# Altium PCB Motor_Driver_Model_D203.PcbDoc (part 4 of 4)
Units mm, origin at the board's own origin, x right, y up, seen from the top; angles counter-clockwise.
Board outline 50 x 35 mm, 4 copper layers (1-SIG-TOP, 2-SIG-GND, 3-SIG-PWR, 4-SIG-BOT), stack 0.96 mm thick; 141 components, 74 nets, 356 pads, 1049 vias.
Unrouted connection lines stored in the file: 1.
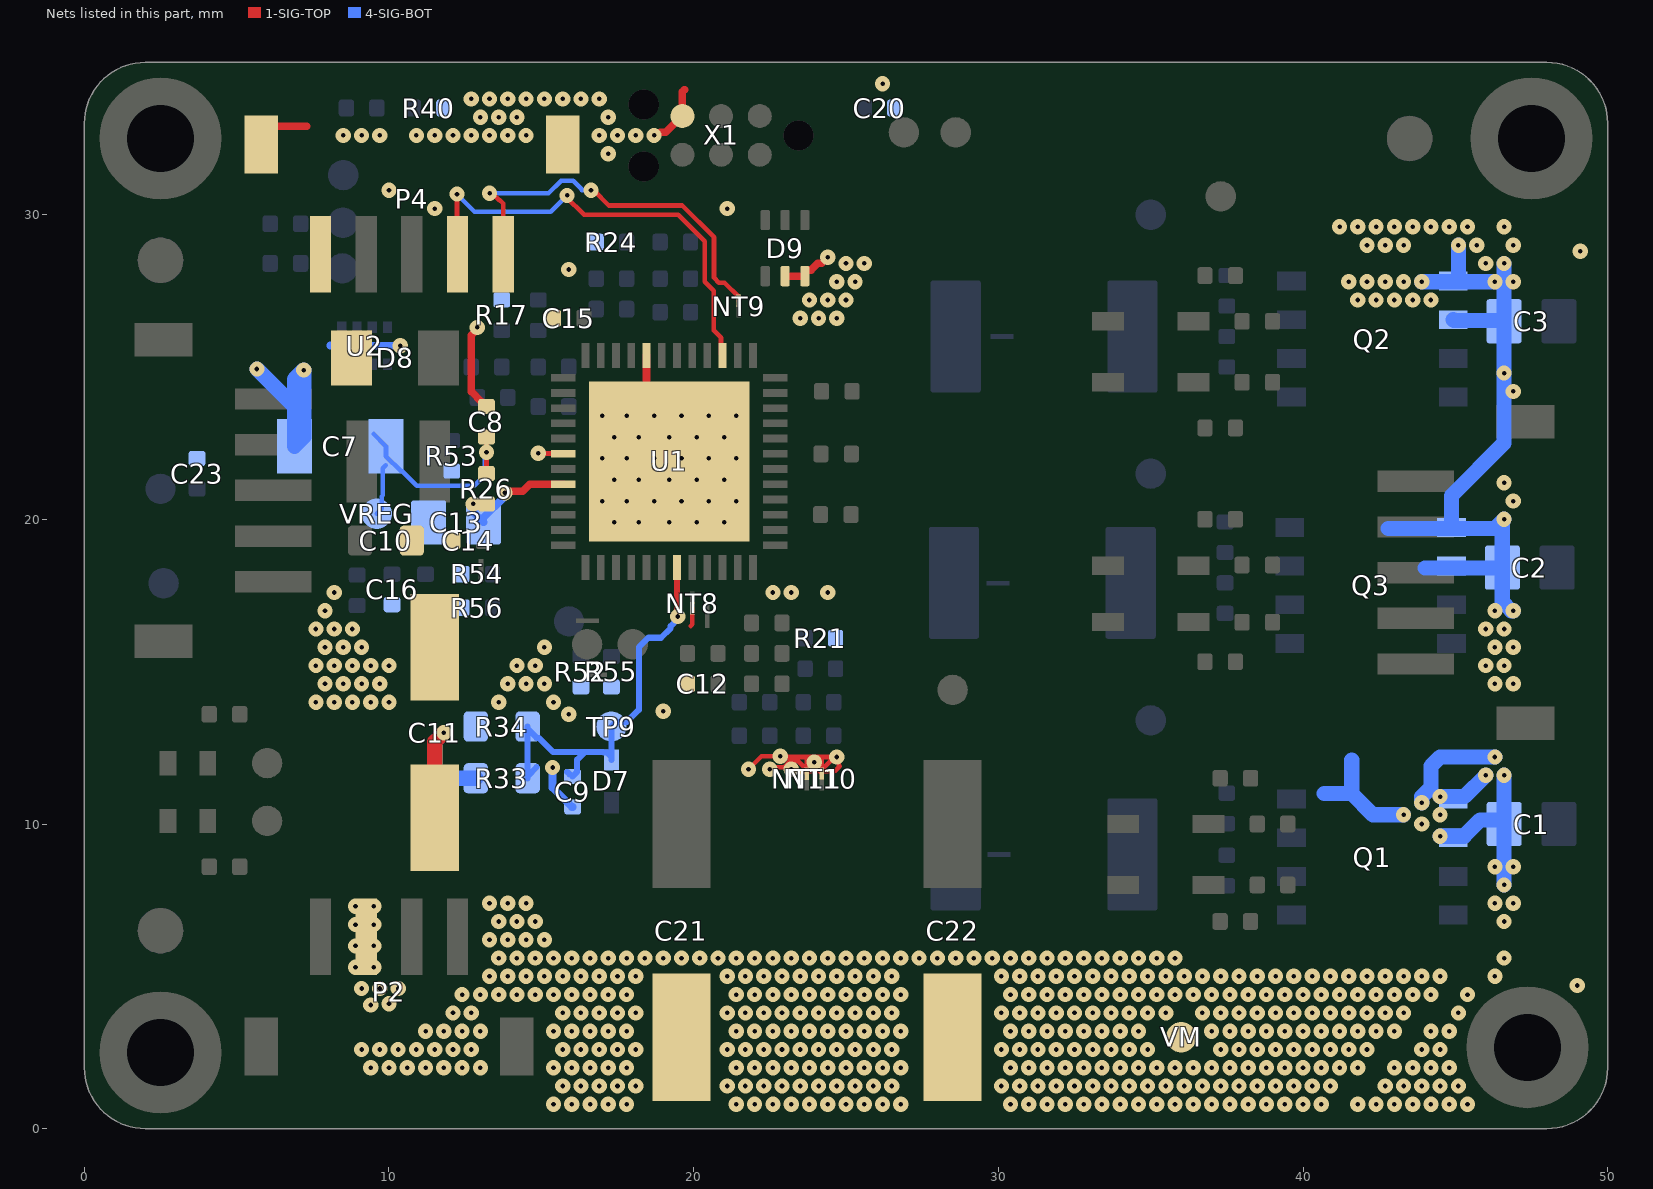
[diagram p5: the nets of this part, all layers, seen from the top]

## Via types
v1: diameter 0.5, hole 0.15, 1-SIG-TOP to 4-SIG-BOT, tented both sides, 1016 vias
v2: diameter 0.605, hole 0.3, 1-SIG-TOP to 4-SIG-BOT, tented both sides, 32 vias
v3: diameter 0.5, hole 0.15, 1-SIG-TOP to 4-SIG-BOT, 1 vias

## Nets (pads, with @x,y where several pads share a name; then routed paths per layer and width w, separated by ;. In a path a pad name is that pad's centre, name@x,y a point inside that pad or via, vN(x,y) a via of type N, cw(c..) or ccw(c..) an arc to the next point about the centre after c; other vN are vias at no path point) (continued)
SIG-GND: C7.1 C8.1 C9.1 C10.1 C11.2 C12.1 C13.1 C14.1 C15.1 C16.1 C20.1 C23.1 D8.2 D9.2 D9.3 NT8.1 NT10.1 NT11.1 P4.5 P4.S1 P4.S2 R17.1 R21.1 R24.1 R34.1 R40.2 R52.2 R53.2 R54.2 R55.2 R56.2 U1.44 U1.49 U2.9 X1.5 | length 32.5
  1-SIG-TOP w0.152: 19.9,16.5 19.958,16.558 NT8.1@19.958,17.076 ; v1(21.8,11.8) 22.226,12.226 v1(22.843,12.226) 22.869,12.2 23.7,12.2 ; v1(22.5,11.8) 22.567,11.867 22.965,11.867 23.158,12.059 23.432,12.059 NT11.1@23.711,11.78 ; v1(23.2,11.8) 23.267,11.733 NT11.1@23.711,11.733 ; NT11.1@23.711,11.653 NT11.1@23.711,11.732 ; NT10.1@24.2,11.656 NT10.1@24.2,11.731 ; 24.479,12.062 NT10.1@24.2,11.783 ; v1(24.7,12.2) 24.766,12.133 24.766,11.934 24.8,11.9 24.631,11.731 NT10.1@24.2,11.731 ; v1(24.7,12.2) 24.2,12.2 ; 23.7,12.2 23.957,12.2 v1@24.131,12.2 ; 23.7,12.2 23.711,12.189 NT11.1@23.711,11.78 ; NT11.1@23.711,11.732 NT10.1@24.2,11.732 ; NT11.1@23.711,11.732 NT11.1@23.711,11.733 ; NT11.1@23.711,11.733 NT11.1@23.711,11.78 ; NT11.1@23.711,11.78 23.921,11.989 v1(23.957,12.026) ; v1(23.957,12.026) v1@24.131,12.2 ; v1(23.957,12.026) NT10.1@24.2,11.783 ; v1@24.131,12.2 24.2,12.2 ; NT10.1@24.2,11.731 NT10.1@24.2,11.732 ; NT10.1@24.2,11.732 NT10.1@24.2,11.783 ; NT10.1@24.2,11.783 24.2,12.2
  1-SIG-TOP w0.25: P4.S2@5.8,32.3 5.8,32.475 6.225,32.9 7.3,32.9 ; D8.2@8.67,25.2 D8.2@8.77,25.3 ; v1(12.9,26.3) 12.9,26.232 12.704,26.036 12.704,24.196 13.05,23.85 13.05,23.825 13.175,23.7 C8.1@13.2,23.7 ; U1.44@18.45,25.38 18.45,22.65 U1.49@19.2,21.9 ; v1@18.9,32.7 19.078,32.7 19.613,33.235 X1.5@19.63,33.235 19.63,34.03 19.7,34.1 ; D9.2@23,27.98 D9.3@23.65,27.98 23.65,28.16 23.675,28.185 23.855,28.185 24.07,28.4 24.2,28.4
  4-SIG-BOT w0.25: 8.076,25.706 9.194,25.706 U2.9@9.2,25.7 v1(10.37,25.7) v1@10.372,25.703 ; v1(15.368,11.856) 15.368,11.193 16.002,10.559 C9.1@16.027,10.559
  4-SIG-BOT w0.5: v3(5.665,24.934) 6.9,23.699 ; 6.9,23.699 6.9,24.6 v1(7.2,24.9) 7.2,22.7 C7.1@6.9,22.4 6.9,23.699
  other v1: 15.9,13.6 19,13.7 7.6,14 8.2,14 8.8,14 9.4,14 10,14 13.6,14 15.4,14 7.9,14.6 8.5,14.6 9.1,14.6 9.7,14.6 13.9,14.6 14.5,14.6 15.1,14.6 7.6,15.2 8.2,15.2 8.8,15.2 9.4,15.2 10,15.2 14.2,15.2 14.8,15.2 7.9,15.8 8.5,15.8 9.1,15.8 15.1,15.8 7.6,16.4 8.2,16.4 8.8,16.4 7.9,17 8.2,17.6 22.6,17.6 23.2,17.6 24.4,17.6 17.4,19.9 18.2,19.9 19.2,19.9 20.1,19.9 21,19.9 17,20.6 17.8,20.6 18.7,20.6 19.6,20.6 20.5,20.6 21.4,20.6 17.4,21.3 18.2,21.3 19.2,21.3 20.1,21.3 21,21.3 17,22 17.8,22 18.7,22 19.6,22 20.5,22 21.4,22 17.4,22.7 18.2,22.7 19.2,22.7 20.1,22.7 21,22.7 17,23.4 17.8,23.4 18.7,23.4 19.6,23.4 20.5,23.4 21.4,23.4 23.5,26.6 24.1,26.6 24.7,26.6 23.8,27.2 24.4,27.2 25,27.2 24.7,27.8 25.3,27.8 15.9,28.2 25,28.4 25.6,28.4 24.4,28.6 11.5,30.2 21.1,30.2 10,30.799 17.2,31.999 8.5,32.599 9.1,32.599 9.7,32.599 10.9,32.599 11.5,32.599 12.1,32.599 12.7,32.599 13.3,32.599 13.9,32.599 14.5,32.599 16.9,32.599 17.5,32.599 18.1,32.599 18.7,32.599 13,33.199 13.6,33.199 14.2,33.199 17.2,33.199 12.7,33.799 13.3,33.799 13.9,33.799 14.5,33.799 15.1,33.799 15.7,33.799 16.3,33.799 16.9,33.799 26.2,34.3
TP.VFB: C9.2 D7.2 R33.1 R34.2 TP9.1 U1.19 | length 14.2
  1-SIG-TOP w0.2: U1.19@19.45,18.42 19.45,16.836 v1(19.475,16.811)
  4-SIG-BOT w0.2: R34.2@14.55,13.2 R34.2@14.55,13.126 ; R33.1@14.847,11.871 14.55,11.574 R33.1@14.55,11.5 R34.2@14.55,13.126 ; C9.2@15.852,11.709 15.93,11.63 15.955,11.63 C9.2@16.027,11.559 16.177,11.708 16.177,12.109 16.425,12.357 ; D7.2@17.3,12.1 D7.2@17.3,12.2 ; v1(19.475,16.811) 19.475,16.73 19.241,16.495 19.241,16.425 18.928,16.112 18.512,16.112 18.2,15.8 18.2,13.744 17.809,13.353 17.453,13.353 TP9.1@17.3,13.2 D7.2@17.3,12.2 ; R34.2@14.55,13.126 14.847,12.829 14.921,12.829 15.393,12.357 16.425,12.357 ; 16.425,12.357 17.043,12.357 17.05,12.35 17.15,12.35 D7.2@17.3,12.2
TP.VREG: C7.2 C8.2 R26.2 U1.6 VREG.1 | length 9.2
  1-SIG-TOP w0.152: R26.2@13.2,21.5 C8.2@13.2,22.7 ; v1(14.9,22.171) 14.911,22.161 15.709,22.161 U1.6@15.72,22.15
  4-SIG-BOT w0.152: C7.2@9.5,22.8 C7.2@9.9,22.4 9.9,22.075 10.399,21.576 10.439,21.576 10.915,21.1 12.8,21.1 13.151,21.451 13.151,22.151 v1(13.2,22.2) ; VREG.1@9.598,20.183 9.76,20.345 9.76,20.75 9.8,20.79 9.8,21.68 C7.2@9.899,21.779
USART1_RX: P4.2 U1.39 | length 15.3
  1-SIG-TOP w0.152: v1(12.233,30.675) 12.233,28.717 P4.2@12.25,28.7 ; v1(15.845,30.632) 15.805,30.592 16.402,29.995 19.498,29.995 20.364,29.129 20.364,27.798 20.657,27.505 20.657,26.2 20.899,25.958 20.899,25.431 U1.39@20.95,25.38
  4-SIG-BOT w0.152: v1(12.233,30.675) 12.807,30.1 15.313,30.1 v1(15.845,30.632)
USART1_TX: NT9.2 P4.1 | length 13.1
  1-SIG-TOP w0.152: v1(13.3,30.7) 13.394,30.7 13.621,30.473 13.642,30.473 13.75,30.365 P4.1@13.75,28.7 ; v1(16.631,30.802) 16.717,30.802 17.219,30.3 19.624,30.3 20.669,29.255 20.669,27.924 20.829,27.764 21.013,27.764 21.474,27.303 NT9.2@21.474,27.176
  4-SIG-BOT w0.152: v1(13.3,30.7) 15.236,30.7 15.647,31.11 16.043,31.11 16.324,30.83 16.324,30.802 v1(16.631,30.802)
VM: C1.2 C2.2 C3.2 C11.1 C13.2 C21.1 C22.1 P2.2 Q1.1D-A Q1.1D-B Q2.1D-A Q2.1D-B Q3.1D-A Q3.1D-B R26.1 R33.2 U1.8 VM.1 | length 49.7
  1-SIG-TOP w0.25: v1(12.768,20.507) 12.771,20.504 13.196,20.504 R26.1@13.2,20.5 ; v1(13.806,20.872) 13.854,20.92 14.387,20.92 14.618,21.15 U1.8@15.72,21.15
  1-SIG-TOP w0.5: C11.1@11.5,10.2 11.504,10.204 11.504,12.7 11.8,12.996 v1(11.804,12.996)
  4-SIG-BOT w0.25: v1(12.768,20.507) 12.768,20.232 C13.2@13.1,19.9 ; C13.2@13.1,20.05 13.758,20.708 13.758,20.824 v1(13.806,20.872)
  4-SIG-BOT w0.5: v1(11.804,12.996) 11.507,12.699 11.507,11.793 11.8,11.5 R33.2@12.85,11.5 ; 40.7,11 41.6,11 ; 41.6,12.1 41.6,11 ; 42.8,19.7 46.3,19.7 v1@46.543,19.942 ; v1(43.3,10.3) 42.3,10.3 41.6,11 ; v1(43.9,27.8) v1(46.3,27.8) ; v1(43.9,10.7) 43.9,10.9 44.2,11.2 44.2,11.9 44.5,12.2 v1@46.299,12.2 ; 44,18.4 46.527,18.4 C2.2@46.543,18.415 ; v1(44.5,9.6) 45.289,9.6 45.816,10.127 46.473,10.127 C1.2@46.6,10 ; v1(44.5,10.9) 45.3,10.9 v1(46,11.6) ; Q3.1D-A@44.873,19.735 44.873,20.773 46.6,22.5 v1(46.6,24.8) ; Q2.1D-B@44.93,26.55 44.955,26.525 46.575,26.525 C3.2@46.6,26.5 ; Q2.1D-A@44.93,27.82 45.04,27.82 45.1,27.88 v1(45.1,29) ; v1(46.6,20) v1@46.543,19.942 ; v1(46.6,8) C1.2@46.6,10 ; v1(46.6,11.6) C1.2@46.6,10 ; v1(46.6,24.8) C3.2@46.6,26.5 ; v1(46.6,28.4) C3.2@46.6,26.5 ; v1(46.9,17) 46.836,17 46.543,17.292 C2.2@46.543,18.415 ; C2.2@46.543,18.415 v1@46.543,19.942
  other v1: 15.4,0.8 16,0.8 16.6,0.8 17.2,0.8 17.8,0.8 21.4,0.8 22,0.8 22.6,0.8 23.2,0.8 23.8,0.8 24.4,0.8 25,0.8 25.6,0.8 26.2,0.8 26.8,0.8 30.4,0.8 31,0.8 31.6,0.8 32.2,0.8 32.8,0.8 33.4,0.8 34,0.8 34.6,0.8 35.2,0.8 35.8,0.8 36.4,0.8 37,0.8 37.6,0.8 38.2,0.8 38.8,0.8 39.4,0.8 40,0.8 40.6,0.8 41.8,0.8 42.4,0.8 43,0.8 43.6,0.8 44.2,0.8 44.8,0.8 45.4,0.8 15.7,1.4 16.3,1.4 16.9,1.4 17.5,1.4 18.1,1.4 21.1,1.4 21.7,1.4 22.3,1.4 22.9,1.4 23.5,1.4 24.1,1.4 24.7,1.4 25.3,1.4 25.9,1.4 26.5,1.4 30.1,1.4 30.7,1.4 31.3,1.4 31.9,1.4 32.5,1.4 33.1,1.4 33.7,1.4 34.3,1.4 34.9,1.4 35.5,1.4 36.1,1.4 36.7,1.4 37.3,1.4 37.9,1.4 38.5,1.4 39.1,1.4 39.7,1.4 40.3,1.4 40.9,1.4 42.7,1.4 43.3,1.4 43.9,1.4 44.5,1.4 45.1,1.4 9.4,2 10,2 10.6,2 11.2,2 11.8,2 12.4,2 13,2 15.4,2 16,2 16.6,2 17.2,2 17.8,2 21.4,2 22,2 22.6,2 23.2,2 23.8,2 24.4,2 25,2 25.6,2 26.2,2 26.8,2 30.4,2 31,2 31.6,2 32.2,2 32.8,2 33.4,2 34,2 34.6,2 35.2,2 35.8,2 36.4,2 37,2 37.6,2 38.2,2 38.8,2 39.4,2 40,2 40.6,2 41.2,2 41.8,2 43,2 43.6,2 44.2,2 44.8,2 9.1,2.6 9.7,2.6 10.3,2.6 10.9,2.6 11.5,2.6 12.1,2.6 12.7,2.6 15.7,2.6 16.3,2.6 16.9,2.6 17.5,2.6 18.1,2.6 21.1,2.6 21.7,2.6 22.3,2.6 22.9,2.6 23.5,2.6 24.1,2.6 24.7,2.6 25.3,2.6 25.9,2.6 26.5,2.6 30.1,2.6 30.7,2.6 31.3,2.6 31.9,2.6 32.5,2.6 33.1,2.6 33.7,2.6 34.3,2.6 34.9,2.6 37.3,2.6 37.9,2.6 38.5,2.6 39.1,2.6 39.7,2.6 40.3,2.6 40.9,2.6 41.5,2.6 42.1,2.6 43.9,2.6 44.5,2.6 11.2,3.2 11.8,3.2 12.4,3.2 13,3.2 15.4,3.2 16,3.2 16.6,3.2 17.2,3.2 17.8,3.2 21.4,3.2 22,3.2 22.6,3.2 23.2,3.2 23.8,3.2 24.4,3.2 25,3.2 25.6,3.2 26.2,3.2 26.8,3.2 30.4,3.2 31,3.2 31.6,3.2 32.2,3.2 32.8,3.2 33.4,3.2 34,3.2 34.6,3.2 37,3.2 37.6,3.2 38.2,3.2 38.8,3.2 39.4,3.2 40,3.2 40.6,3.2 41.2,3.2 41.8,3.2 42.4,3.2 43,3.2 44.2,3.2 44.8,3.2 12.1,3.8 12.7,3.8 15.7,3.8 16.3,3.8 16.9,3.8 17.5,3.8 18.1,3.8 21.1,3.8 21.7,3.8 22.3,3.8 22.9,3.8 23.5,3.8 24.1,3.8 24.7,3.8 25.3,3.8 25.9,3.8 26.5,3.8 30.1,3.8 30.7,3.8 31.3,3.8 31.9,3.8 32.5,3.8 33.1,3.8 33.7,3.8 34.3,3.8 34.9,3.8 35.5,3.8 36.7,3.8 37.3,3.8 37.9,3.8 38.5,3.8 39.1,3.8 39.7,3.8 40.3,3.8 40.9,3.8 41.5,3.8 42.1,3.8 42.7,3.8 43.3,3.8 45.1,3.8 9.401,4.058 10,4.1 12.4,4.4 13,4.4 13.6,4.4 14.2,4.4 14.8,4.4 15.4,4.4 16,4.4 16.6,4.4 17.2,4.4 17.8,4.4 21.4,4.4 22,4.4 22.6,4.4 23.2,4.4 23.8,4.4 24.4,4.4 25,4.4 25.6,4.4 26.2,4.4 26.8,4.4 30.4,4.4 31,4.4 31.6,4.4 32.2,4.4 32.8,4.4 33.4,4.4 34,4.4 34.6,4.4 35.2,4.4 35.8,4.4 36.4,4.4 37,4.4 37.6,4.4 38.2,4.4 38.8,4.4 39.4,4.4 40,4.4 40.6,4.4 41.2,4.4 41.8,4.4 42.4,4.4 43,4.4 43.6,4.4 44.2,4.4 45.4,4.4 9.1,4.6 9.7,4.6 10.3,4.6 49,4.7 13.3,5 13.9,5 14.5,5 15.1,5 15.7,5 16.3,5 16.9,5 17.5,5 18.1,5 21.1,5 21.7,5 22.3,5 22.9,5 23.5,5 24.1,5 24.7,5 25.3,5 25.9,5 26.5,5 30.1,5 30.7,5 31.3,5 31.9,5 32.5,5 33.1,5 33.7,5 34.3,5 34.9,5 35.5,5 36.1,5 36.7,5 37.3,5 37.9,5 38.5,5 39.1,5 39.7,5 40.3,5 40.9,5 41.5,5 42.1,5 42.7,5 43.3,5 43.9,5 44.5,5 46.3,5 8.9,5.3 9.5,5.3 13.6,5.6 14.2,5.6 14.8,5.6 15.4,5.6 16,5.6 16.6,5.6 17.2,5.6 17.8,5.6 18.4,5.6 19,5.6 19.6,5.6 20.2,5.6 20.8,5.6 21.4,5.6 22,5.6 22.6,5.6 23.2,5.6 23.8,5.6 24.4,5.6 25,5.6 25.6,5.6 26.2,5.6 26.8,5.6 27.4,5.6 28,5.6 28.6,5.6 29.2,5.6 29.8,5.6 30.4,5.6 31,5.6 31.6,5.6 32.2,5.6 32.8,5.6 33.4,5.6 34,5.6 34.6,5.6 35.2,5.6 35.8,5.6 46.6,5.6 8.9,6 9.5,6 13.3,6.2 13.9,6.2 14.5,6.2 15.1,6.2 8.9,6.7 9.5,6.7 13.6,6.8 14.2,6.8 14.8,6.8 46.6,6.8 8.9,7.3 9.5,7.3 13.3,7.4 13.9,7.4 14.5,7.4 46.3,7.4 46.9,7.4 46.3,8.6 46.9,8.6 43.9,10 44.5,10.3 46.3,12.2 46.3,14.6 46.9,14.6 46,15.2 46.6,15.2 46.3,15.8 46.9,15.8 46,16.4 46.6,16.4 46.3,17 46.9,20.6 46.6,21.2 46.9,24.2 41.8,27.2 42.4,27.2 43,27.2 43.6,27.2 44.2,27.2 41.5,27.8 42.1,27.8 42.7,27.8 43.3,27.8 46.9,27.8 46,28.4 49.1,28.8 42.1,29 42.7,29 43.3,29 45.7,29 46.9,29 41.2,29.6 41.8,29.6 42.4,29.6 43,29.6 43.6,29.6 44.2,29.6 44.8,29.6 45.4,29.6 46.6,29.6
pads on no net: 2. FID1. FID2. U2.4 X1.0

## Polygon pours and split planes (outlines as drawn)
GND on 1-SIG-TOP "GND_L01_P010" (solid, pour order 10): 0,0 8.3,0 8.3,11.8 9.2,12.7 13.1,12.7 13.9,11.9 14.7,11.1 14.7,8.2 16,6.9 30.4,6.9 30.4,9.7 17.4,9.7 14.172,13.499 7.103,13.5 7.102,13.499 7,13.6 7,34.633 6.994,34.639 1.239,34.639 0,33.4
SIG-GND on 1-SIG-TOP "SIG-GND_L01_P016" (solid, pour order 16): 21.6,11.6 25,11.6 25,16.6 24.8,16.6 22.3,19.1 22.363,19.163 22.363,26.263 25,28.9 25,35 7.1,35 7.113,34.987 7.113,13.887 7.4,13.6 19.6,13.6
GND on 1-SIG-TOP "GND_L01_P021" (solid, pour order 21): 14.302,13.6 19.6,13.6 21.6,11.6 23.432,11.6 23.432,11.577 23.711,11.297 23.714,11.3 24.2,11.3 24.2,11.321 24.479,11.6 30.5,11.6 30.5,9.9 17.4,9.9
VM on 1-SIG-TOP "VM_L01_P004" (solid, pour order 4): 8.5,11.8 9.3,12.6 13,12.6 14.6,11 14.6,8 15.9,6.7 35.2,6.7 36.3,5.6 44.5,5.6 45.6,6.7 45.6,20.4 43.7,22.3 40.5,22.3 40.5,30 48.7,30 49.5,29.2 49.5,2.2 47.8,0.5 8.5,0.5
GND on 1-SIG-TOP "GND_L01_P019" (solid, pour order 19): 25,28.9 34,28.9 36.6,31.5 40.4,31.5 41.6,30.3 50,30.3 50,33.5 48.5,35 25,35
BLDC_W on 1-SIG-TOP "BLDC_W_L01_P000" (solid, pour order 0): 40.7,17.7 45.5,17.7 45.8,18 45.8,25.9 41,25.9 40.5,25.4 40.5,20.3 40.7,20.1
BLDC_V on 1-SIG-TOP "BLDC_V_L01_P018" (solid, pour order 18): 40.9,17.7 45.6,17.7 45.6,16 42.1,16 42.1,14.9 39.8,14.9 39.4,15.3 39.4,19.2 40.9,19.2
BLDC_U on 1-SIG-TOP "BLDC_U_L01_P017" (solid, pour order 17): 42.1,16 45.6,16 45.6,6.7 44.5,5.6 40.4,5.6 40.4,8.5 39.9,9 39.9,14.4 40,14.5 42.1,14.5
VM on 4-SIG-BOT "VM_L04_P008" (solid, pour order 8): 8.5,0.5 8.5,7.8 15.2,7.8 15.2,7 15.8,6.4 40.5,6.4 41,5.9 45.4,5.9 45.8,6.3 45.8,8.7 45.6,8.9 40.7,8.9 40.4,9.2 40.4,13.4 45.6,13.4 45.6,17.4 45.2,17.8 40.5,17.8 40.5,21.7 41,22.2 45.4,22.2 45.6,22.4 45.6,25.9 40.7,25.9 40.4,26.2 40.4,30.1 47.4,30.1 47.4,0.5
SENSE1_P on 4-SIG-BOT "SENSE1_P_L04_P007" (solid, pour order 7): 32.9,11.3 33.2,11.6 35.4,11.6 35.7,11.3 35.7,9 36.1,8.6 37.9,8.6 38.7,7.8 40.7,7.8 40.7,6.2 32.9,6.2
BLDC_U on 4-SIG-BOT "BLDC_U_L04_P001" (solid, pour order 1): 36.71,10.69 38.51,10.69 38.81,10.39 40.81,10.39 40.81,9.449 40.97,9.29 45.51,9.29 45.51,5.89 40.41,5.89 40.41,8.49 40.009,8.891 36.71,8.891
SIG-GND on 4-SIG-BOT "SIG-GND_L04_P014" (solid, pour order 14): 0.36,10.802 0.458,10.9 14.9,10.9 16.5,9.3 18.2,9.3 18.2,12.7 18.6,13.1 20.6,13.1 21.9,11.8 25.5,11.8 25.5,27.6 29.1,31.2 29.1,35 2.6,35 0.3,32.7
GND on 4-SIG-BOT "GND_L04_P020" (solid, pour order 20): 29.1,34.643 29.157,34.7 48.5,34.7 50,33.2 50,2 48,0 46.7,0 46.7,4.122 47.4,4.822 47.4,30.1 36,30.1 35,31.1 33.7,31.1 32.7,30.1 28,30.1 29.1,31.2
GND on 4-SIG-BOT "GND_L04_P023" (solid, pour order 23): 27.8,17.8 26.9,17.8 26.8,17.9 26.8,19.7 27.7,20.6 29.3,20.6 30.2,19.25 30.2,18.1 28.1,18.1
SENSE3_P on 4-SIG-BOT "SENSE3_P_L04_P012" (solid, pour order 12): 32.9,28.2 33.2,28.5 35.4,28.5 35.7,28.2 35.7,25.9 36.1,25.5 37.9,25.5 38.7,24.7 40.7,24.7 40.7,23.1 32.9,23.1
BLDC_V on 4-SIG-BOT "BLDC_V_L04_P002" (solid, pour order 2): 36.834,19.599 38.634,19.599 38.934,19.299 40.934,19.299 40.934,18.358 41.094,18.199 45.4,18.199 45.4,14.799 40.534,14.799 40.534,17.066 39.9,17.7 36.834,17.7
GND on 4-SIG-BOT "GND_L04_P022" (solid, pour order 22): 26.5,28.2 27.6,29.3 30.3,29.3 31.1,28.5 31.1,26.5 30.9,26.3 26.5,26.3
GND on 4-SIG-BOT "GND_L04_P009" (solid, pour order 9): 8.3,0.4 0.3,0.4 0.3,10.7 14.8,10.7 16.3,9.2 18.4,9.2 18.4,12.4 20.8,12.4 20.8,11.9 21.6,11.1 26.7,11.1 27.2,11.6 27.2,12.4 30.2,12.4 30.2,7.2 29.5,6.5 15.9,6.5 15.4,7 15.4,8 8.3,8
SENSE2_P on 4-SIG-BOT "SENSE2_P_L04_P013" (solid, pour order 13): 33,20.1 33.3,20.4 35.5,20.4 35.8,20.1 35.8,17.8 36.2,17.4 38,17.4 38.8,16.6 40.8,16.6 40.8,15 33,15
BLDC_W on 4-SIG-BOT "BLDC_W_L04_P005" (solid, pour order 5): 36.8,27.5 38.6,27.5 38.9,27.2 40.9,27.2 40.9,26.26 41.06,26.1 45.407,26.1 45.407,22.7 40.5,22.7 40.5,25.3 40,25.8 36.8,25.8
GND on 3-SIG-PWR (split plane): 30.371,6.754 30.346,6.729 17.554,6.729 16.292,7.992 16.25,8.02 16.2,8.029 9,8.029 8.95,8.02 8.908,7.992 8.508,7.592 8.48,7.55 8.471,7.5 8.471,1.3 8.48,1.25 8.508,1.208 8.55,1.18 8.6,1.171 13.6,1.171 13.65,1.18 13.692,1.208 13.72,1.25 13.729,1.3 13.729,1.946 13.754,1.971 14.546,1.971 14.771,1.746 14.771,1.354 14.408,0.992 14.38,0.95 14.371,0.9 14.371,0.51 2,0.51 1.985,0.509 1.833,0.518 1.668,0.546 1.507,0.592 1.353,0.656 1.206,0.737 1.07,0.834 0.945,0.945 0.834,1.07 0.737,1.206 0.656,1.353 0.592,1.507 0.546,1.668 0.518,1.833 0.509,1.985 0.51,2 0.51,9.871 30.371,9.871
VM on 3-SIG-PWR (split plane): 49.49,2 49.491,1.985 49.482,1.833 49.454,1.668 49.408,1.507 49.344,1.353 49.263,1.206 49.166,1.07 49.055,0.945 48.93,0.834 48.794,0.737 48.647,0.656 48.493,0.592 48.332,0.546 48.167,0.518 48.015,0.509 48,0.51 14.629,0.51 14.629,0.846 14.992,1.208 15.02,1.25 15.029,1.3 15.029,1.8 15.02,1.85 14.992,1.892 14.692,2.192 14.65,2.22 14.6,2.229 13.7,2.229 13.65,2.22 13.608,2.192 13.508,2.092 13.48,2.05 13.471,2 13.471,1.429 8.729,1.429 8.729,7.446 9.054,7.771 16.146,7.771 17.408,6.508 17.45,6.48 17.5,6.471 30.4,6.471 30.45,6.48 30.492,6.508 30.504,6.521 35.696,6.521 36.208,6.008 36.25,5.98 36.3,5.971 44.6,5.971 44.65,5.98 44.692,6.008 44.72,6.05 44.729,6.1 44.72,6.15 44.719,6.15 44.72,6.15 44.729,6.2 44.729,7.3 44.729,8.6 44.72,8.65 44.692,8.692 44.65,8.72 44.6,8.729 40.729,8.729 40.729,14.971 45,14.971 45.05,14.98 45.092,15.008 45.12,15.05 45.129,15.1 45.129,15.3 45.129,15.8 45.129,17.6 45.12,17.65 45.092,17.692 45.05,17.72 45,17.729 40.629,17.729 40.629,23.171 45.5,23.171 45.55,23.18 45.592,23.208 45.692,23.308 45.72,23.35 45.729,23.4 45.729,25.8 45.72,25.85 45.692,25.892 45.65,25.92 45.6,25.929 40.629,25.929 40.629,29.6 40.62,29.65 40.592,29.692 40.483,29.8 40.592,29.908 40.654,29.971 49.49,29.971
TP.VREG on 3-SIG-PWR (split plane): 15.171,21.929 14.107,21.929 14.073,21.952 14.023,21.962 13.974,21.952 13.94,21.929 12.929,21.929 12.929,22.871 15.171,22.871
NRST on 3-SIG-PWR (split plane): 11.971,25.9 11.98,25.85 12.008,25.808 14.108,23.708 14.15,23.68 14.2,23.671 15.846,23.671 15.971,23.546 15.971,20.529 14.4,20.529 14.35,20.52 14.308,20.492 12.308,18.492 12.28,18.45 12.271,18.4 12.271,17.929 8.529,17.929 8.529,18.871 11.191,18.871 11.24,18.88 11.282,18.908 14.044,21.671 15.3,21.671 15.35,21.68 15.392,21.708 15.42,21.75 15.429,21.8 15.429,23 15.42,23.05 15.392,23.092 15.35,23.12 15.3,23.129 13.024,23.129 13.02,23.15 12.992,23.192 11.029,25.154 11.029,26.971 11.971,26.971
+3V3 on 3-SIG-PWR (split plane): 2,34.49 27.871,34.49 27.871,32.254 22.908,27.292 22.88,27.25 22.871,27.2 22.871,10.129 0.51,10.129 0.51,33 0.509,33.015 0.518,33.167 0.546,33.332 0.592,33.493 0.656,33.647 0.737,33.794 0.834,33.93 0.945,34.055 1.07,34.166 1.206,34.263 1.353,34.344 1.507,34.408 1.668,34.454 1.833,34.482 1.985,34.491
GND on 3-SIG-PWR (split plane): 24.35,14.98 24.4,14.971 40.471,14.971 40.471,10.829 38.254,10.829 36.892,12.192 36.85,12.22 36.8,12.229 26.254,12.229 24.329,14.154 24.329,14.994
BLDC_V on 3-SIG-PWR (split plane): 26.571,22.354 25.108,20.892 25.08,20.85 25.071,20.8 25.071,19.6 25.08,19.55 25.108,19.508 27.108,17.508 27.15,17.48 27.2,17.471 35.6,17.471 35.65,17.48 35.692,17.508 38.154,19.971 40.371,19.971 40.371,17.6 40.38,17.55 40.408,17.508 40.45,17.48 40.5,17.471 44.871,17.471 44.871,15.8 44.871,15.3 44.871,15.229 24.454,15.229 24.392,15.292 24.35,15.32 24.329,15.324 24.329,23.271 26.571,23.271
BLDC_U on 3-SIG-PWR (split plane): 26.571,23.529 24.2,23.529 24.15,23.52 24.108,23.492 24.08,23.45 24.071,23.4 24.071,14.1 24.08,14.05 24.108,14.008 26.108,12.008 26.15,11.98 26.2,11.971 36.746,11.971 38.108,10.608 38.15,10.58 38.2,10.571 40.471,10.571 40.471,8.6 40.48,8.55 40.508,8.508 40.55,8.48 40.6,8.471 44.471,8.471 44.471,7.3 44.471,6.229 36.354,6.229 35.842,6.742 35.8,6.77 35.75,6.779 30.629,6.779 30.629,9.9 30.62,9.95 30.619,9.95 30.62,9.95 30.629,10 30.62,10.05 30.592,10.092 30.55,10.12 30.5,10.129 23.129,10.129 23.129,25.671 26.571,25.671
BLDC_W on 3-SIG-PWR (split plane): 40.371,29.546 40.371,25.8 40.38,25.75 40.408,25.708 40.45,25.68 40.5,25.671 45.471,25.671 45.471,23.454 45.446,23.429 40.5,23.429 40.45,23.42 40.408,23.392 40.38,23.35 40.371,23.3 40.371,20.229 38.1,20.229 38.05,20.22 38.008,20.192 35.546,17.729 27.254,17.729 25.329,19.654 25.329,20.746 26.754,22.171 32.4,22.171 32.45,22.18 32.492,22.208 35.992,25.708 36.02,25.75 36.029,25.8 36.029,29.671 40.246,29.671
GND on 3-SIG-PWR (split plane): 47.871,19.929 42.729,19.929 42.729,21.771 47.871,21.771
GND on 3-SIG-PWR (split plane): 48.167,34.482 48.332,34.454 48.493,34.408 48.647,34.344 48.794,34.263 48.93,34.166 49.055,34.055 49.166,33.93 49.263,33.794 49.344,33.647 49.408,33.493 49.454,33.332 49.482,33.167 49.491,33.015 49.49,33 49.49,30.229 40.6,30.229 40.55,30.22 40.508,30.192 40.408,30.092 40.246,29.929 35.9,29.929 35.85,29.92 35.808,29.892 35.78,29.85 35.771,29.8 35.771,25.854 32.346,22.429 26.829,22.429 26.829,23.4 26.829,25.8 26.82,25.85 26.792,25.892 26.75,25.92 26.7,25.929 23.129,25.929 23.129,27.146 28.092,32.108 28.12,32.15 28.129,32.2 28.129,34.49 48,34.49 48.015,34.491
GND on 2-SIG-GND (split plane): 36.171,6.129 16.554,6.129 14.492,8.192 14.45,8.22 14.4,8.229 8.7,8.229 8.65,8.22 8.608,8.192 8.58,8.15 8.571,8.1 8.571,0.51 2,0.51 1.985,0.509 1.833,0.518 1.668,0.546 1.507,0.592 1.353,0.656 1.206,0.737 1.07,0.834 0.945,0.945 0.834,1.07 0.737,1.206 0.656,1.353 0.592,1.507 0.546,1.668 0.518,1.833 0.509,1.985 0.51,2 0.51,9.571 36.171,9.571
GND on 2-SIG-GND (split plane): 2,34.49 4.871,34.49 4.871,13.1 4.88,13.05 4.908,13.008 7.008,10.908 7.05,10.88 7.1,10.871 17.5,10.871 17.55,10.88 17.592,10.908 18.454,11.771 19.346,11.771 19.371,11.746 19.371,10.2 19.371,9.829 0.51,9.829 0.51,33 0.509,33.015 0.518,33.167 0.546,33.332 0.592,33.493 0.656,33.647 0.737,33.794 0.834,33.93 0.945,34.055 1.07,34.166 1.206,34.263 1.353,34.344 1.507,34.408 1.668,34.454 1.833,34.482 1.985,34.491
SIG-GND on 2-SIG-GND (split plane): 26.571,13.054 24.908,11.392 24.646,11.129 20.854,11.129 20.829,11.154 20.829,11.9 20.82,11.95 20.792,11.992 20.75,12.02 20.7,12.029 18.4,12.029 18.35,12.02 18.308,11.992 17.446,11.129 7.154,11.129 5.129,13.154 5.129,25.671 7.7,25.671 7.75,25.68 7.792,25.708 8.054,25.971 9.346,25.971 10.408,24.908 10.45,24.88 10.5,24.871 11.4,24.871 11.45,24.88 11.492,24.908 12.092,25.508 12.12,25.55 12.129,25.6 12.129,26.746 12.254,26.871 13.771,26.871 13.771,24.6 13.771,23.554 13.546,23.329 8.9,23.329 8.85,23.32 8.808,23.292 6.708,21.192 6.68,21.15 6.671,21.1 6.671,14.6 6.671,13.8 6.68,13.75 6.708,13.708 7.908,12.508 7.95,12.48 8,12.471 16.8,12.471 16.85,12.48 16.892,12.508 17.554,13.171 22.271,13.171 22.271,12.7 22.28,12.65 22.308,12.608 22.35,12.58 22.4,12.571 22.45,12.58 22.492,12.608 22.52,12.65 22.529,12.7 22.529,13.3 22.52,13.35 22.492,13.392 22.45,13.42 22.4,13.429 17.5,13.429 17.45,13.42 17.408,13.392 16.746,12.729 12.629,12.729 12.629,13.7 12.629,19.346 13.454,20.171 14.9,20.171 14.95,20.18 14.992,20.208 15.02,20.25 15.029,20.3 15.029,21.4 15.02,21.45 14.992,21.492 14.95,21.52 14.9,21.529 12.8,21.529 12.75,21.52 12.708,21.492 11.508,20.292 11.48,20.25 11.471,20.2 11.471,13.554 11.008,13.092 10.98,13.05 10.971,13 10.971,12.729 8.054,12.729 6.929,13.854 6.929,14.6 6.929,21.046 8.954,23.071 13.6,23.071 13.65,23.08 13.692,23.108 13.992,23.408 14.02,23.45 14.029,23.5 14.029,24.6 14.029,27 14.02,27.05 13.992,27.092 13.95,27.12 13.9,27.129 12.2,27.129 12.15,27.12 12.108,27.092 11.908,26.892 11.88,26.85 11.871,26.8 11.871,25.654 11.346,25.129 10.554,25.129 9.492,26.192 9.45,26.22 9.4,26.229 8,26.229 7.95,26.22 7.908,26.192 7.646,25.929 5.129,25.929 5.129,34.49 26.571,34.49
GND on 2-SIG-GND (split plane): 48.167,34.482 48.332,34.454 48.493,34.408 48.647,34.344 48.794,34.263 48.93,34.166 49.055,34.055 49.166,33.93 49.263,33.794 49.344,33.647 49.408,33.493 49.454,33.332 49.482,33.167 49.491,33.015 49.49,33 49.49,2 49.491,1.985 49.482,1.833 49.454,1.668 49.408,1.507 49.344,1.353 49.263,1.206 49.166,1.07 49.055,0.945 48.93,0.834 48.794,0.737 48.647,0.656 48.493,0.592 48.332,0.546 48.167,0.518 48.015,0.509 48,0.51 41.294,0.51 47.492,6.708 47.52,6.75 47.529,6.8 47.529,28.2 47.52,28.25 47.492,28.292 45.592,30.192 45.55,30.22 45.5,30.229 36.3,30.229 36.25,30.22 36.208,30.192 36.18,30.15 36.171,30.1 36.171,9.829 19.629,9.829 19.629,10.2 19.629,11.771 20.571,11.771 20.571,11.1 20.58,11.05 20.608,11.008 20.708,10.908 20.75,10.88 20.8,10.871 24.7,10.871 24.75,10.88 24.792,10.908 25.092,11.208 26.792,12.908 26.82,12.95 26.829,13 26.829,34.49 48,34.49 48.015,34.491
VM on 2-SIG-GND (split plane): 14.771,20.429 13.4,20.429 13.35,20.42 13.308,20.392 12.408,19.492 12.38,19.45 12.371,19.4 12.371,13.7 12.371,12.729 11.229,12.729 11.229,12.946 11.692,13.408 11.72,13.45 11.729,13.5 11.729,20.146 12.854,21.271 14.771,21.271
VM on 2-SIG-GND (split plane): 47.271,28.146 47.271,6.854 40.927,0.51 8.829,0.51 8.829,7.971 14.346,7.971 16.408,5.908 16.45,5.88 16.5,5.871 36.2,5.871 36.25,5.88 36.25,5.881 36.25,5.88 36.3,5.871 36.35,5.88 36.392,5.908 36.42,5.95 36.429,6 36.429,9.7 36.429,29.971 45.446,29.971

## Other copper
1-SIG-TOP:
  pour cut-out: 6.8,25.3 7.8,25.3 7.8,24.65 7.602,24.452 7.555,24.5 6.8,24.5
  pour cut-out: 12.4,26.6 13.4,26.6 13.4,24.2 13.6,24 13.6,23.4 12.4,23.4
  text "'.Layer_Name'" at 77.259,62.002 h1.5
4-SIG-BOT:
  pour cut-out: 12.333,26.503 12.63,26.8 12.8,26.8 13.151,26.449 13.151,26.034 13.072,26.034 12.647,25.609 12.333,25.609
  pour cut-out: 5.1,25.3 7.678,25.3 7.678,23.1 7.678,21.387 7.678,21.1 5.1,21.1
  text "'.Layer_Name'" at 90.109,62.152 h1.5
2-SIG-GND (plane layer: these items are gaps in the copper):
  lines w0.254: 0,9.7 5,9.7 19.5,9.7 19.5,10.2 19.5,11.8 19.4,11.9 ; 5,34.8 5,13.1 7.1,11 17.5,11 18.4,11.9 18.6,11.9 19.4,11.9 ; 5.1,25.8 6.8,25.8 7.7,25.8 8,26.1 9.4,26.1 10.5,25 11.4,25 12,25.6 12,26.8 12.2,27 13.9,27 13.9,24.6 13.9,23.5 13.6,23.2 8.9,23.2 6.8,21.1 6.8,14.6 6.8,13.8 8,12.6 11.1,12.6 ; 8.7,0 8.7,8.1 14.4,8.1 16.5,6 36.2,6 ; 17.4,9.7 36.3,9.7 ; 22.4,12.7 22.4,13.3 17.5,13.3 16.8,12.6 12.5,12.6 ; 26.7,34.8 26.7,13 25,11.3 24.7,11 20.8,11 20.7,11.1 20.7,11.9 19.4,11.9 ; 36.3,6 36.3,9.7 ; 40.9,0.3 47.4,6.8 47.4,28.2 45.5,30.1 45.1,30.1 40.5,30.1 36.3,30.1 36.3,9.7 ; 11.1,12.6 11.1,13 11.6,13.5 11.6,20.2 12.8,21.4 14.9,21.4 14.9,20.3 13.4,20.3 12.5,19.4 12.5,13.7 12.5,12.6 ; 11.1,12.6 12,12.6 12.5,12.6
  text "'.Layer_Name'" at 77.409,59.152 h1.5
3-SIG-PWR (plane layer: these items are gaps in the copper):
  lines w0.254: 0.2,10 2,10 18.1,10 30.5,10 ; 12.9,23.1 10.9,25.1 10.9,27.1 12.1,27.1 12.1,25.9 14.2,23.8 15.9,23.8 16.1,23.6 16.1,20.4 15.3,20.4 14.4,20.4 12.4,18.4 12.4,17.8 8.5,17.8 8.4,17.7 8.4,19 11.191,19 14.023,21.833 ; 14.5,0.4 14.5,0.9 14.9,1.3 14.9,1.8 14.6,2.1 13.7,2.1 13.6,2 13.6,1.3 8.6,1.3 8.6,7.5 9,7.9 16.2,7.9 17.5,6.6 30.4,6.6 30.5,6.7 30.5,9.9 ; 23,10.1 23,27.2 28,32.2 28,34.9 ; 23,25.8 26.7,25.8 26.7,23.4 ; 24.3,15.2 24.4,15.1 27.3,15.1 40.5,15.1 45,15.1 45,15.3 45,15.8 45,17.6 40.5,17.6 40.5,23.3 45.5,23.3 45.6,23.4 45.6,25.8 40.5,25.8 40.5,29.6 40.3,29.8 ; 30.45,6.65 35.75,6.65 36.3,6.1 40.6,6.1 44.6,6.1 ; 40.5,20.1 38.1,20.1 35.6,17.6 27.2,17.6 25.2,19.6 25.2,20.8 26.7,22.3 ; 40.5,30 40.6,30.1 ; 40.6,10.7 38.2,10.7 36.8,12.1 34.2,12.1 26.2,12.1 24.2,14.1 24.2,23.4 26.7,23.4 ; 40.6,15 40.6,8.6 44.6,8.6 44.6,7.3 44.6,6.2 ; 49.9,30.1 40.6,30.1 ; 26.7,22.3 32.4,22.3 35.9,25.8 35.9,29.8 ; 26.7,22.3 26.7,23.4 ; 35.9,29.8 40.3,29.8 ; 35.9,29.8 35.9,29.8 ; 40.3,29.8 40.6,30.1 ; 12.8,21.8 12.8,23 15.3,23 15.3,21.8 12.8,21.8 ; 42.6,19.8 42.6,21.9 48,21.9 48,19.8 42.6,19.8
  text "'.Layer_Name'" at 77.409,56.152 h1.5
Multi-Layer:
  text "'.Layer_Name'" at 78.409,-4.348 h1.5

## Silkscreen, mask and mechanical layers (free items; w line width, h text height)
Top Overlay:
  text "3V3" at 25.725,33.425 h0.8
  text "'.Layer_Name'" at 77.409,14.652 h1.5
Bottom Overlay:
  text "3V3" at 0.825,20.625 h0.8 r270
  text "GND" at 0.825,16.925 h0.8 r270
  text "'.Layer_Name'" at 95.109,14.652 h1.5
Top Paste:
  text "'.Layer_Name'" at 79.409,11.652 h1.5
Bottom Paste:
  text "'.Layer_Name'" at 93.109,11.152 h1.5
Top Solder:
  text "'.Layer_Name'" at 78.409,7.652 h1.5
Bottom Solder:
  text "'.Layer_Name'" at 94.109,8.152 h1.5
Drill Guide:
  text "'.Layer_Name'" at 78.409,4.152 h1.5
Mechanical 1:
  text "'.Layer_Name'" at 75.409,53.152 h1.5
Mechanical 5:
  text "'.Layer_Name'" at 75.409,50.152 h1.5
Mechanical 7:
  text "'.Layer_Name'" at 75.409,47.152 h1.5
Dimensions:
  the board outline again, w0.15
  text "'.Layer_Name'" at 77.409,45.152 h1.5
Fiducials:
  text "'.Layer_Name'" at 78.409,42.152 h1.5
Mechanical 11:
  text "'.Layer_Name'" at 75.409,39.152 h1.5
Outline:
  lines w1: 0,2 ccw(c2,2) 2,0 48,0 ccw(c48,2) 50,2 50,33 ccw(c48,33) 48,35 2,35 ccw(c2,33) 0,33 0,3 0,2
  text "'.Layer_Name'" at 80.409,36.152 h1.5
3D Body TOP:
  text "'.Layer_Name'" at 76.409,32.652 h1.5
TOP ASSY:
  text "'.Layer_Name'" at 79.409,29.152 h1.5
Courtyard TOP:
  text "'.Layer_Name'" at 76.409,25.652 h1.5
PCB Sheet:
  lines w0.203: 63.259,65.002 106.259,65.002 ; 63.259,-12.998 63.259,69.002 66.259,69.002 106.259,69.002 106.259,-12.998 63.259,-12.998
  lines w0.7: -68.473,-219.854 -68.473,77.146 ; -68.473,-145.604 -63.473,-145.604 ; -68.473,-71.354 -63.473,-71.354 ; -68.473,2.896 -63.473,2.896 ; -63.473,-184.167 2.134,-184.167 40.234,-184.167 116.527,-184.167 ; -25.366,-214.854 -25.366,-184.167 ; -25.366,-207.027 116.527,-207.027 ; -25.366,-199.407 116.527,-199.407 ; -25.366,-191.787 116.527,-191.787 ; -3.403,-219.854 -3.403,-214.854 ; -3.403,72.146 -3.403,77.146 ; 30.074,-214.854 30.074,-199.407 30.074,-184.167 ; 56.527,-219.854 56.527,-214.854 ; 56.527,72.146 56.527,77.146 ; 83.414,-214.854 83.414,-199.407 ; 116.527,-145.604 121.527,-145.604 ; 116.527,-71.354 121.527,-71.354 ; 116.527,2.896 121.527,2.896 ; -88.473,-219.854 -88.473,77.146 121.527,77.146 121.527,-219.854 -88.473,-219.854 ; -63.473,-214.854 116.527,-214.854 116.527,72.146 -63.473,72.146 -63.473,-214.854
  text "1" at -33.473,73.646 h0.8
  text "2" at 26.527,73.646 h0.8
  text "3" at 86.527,73.646 h0.8
  text "Layer Identifier" at 74.409,66.652 h1.5
  text "A" at -66.473,37.521 h0.8
  text "A" at 118.527,37.521 h0.8
  text "'.Layer_Name'" at 79.409,22.152 h1.5
  text "B" at -66.473,-36.729 h0.8
  text "B" at 118.527,-36.729 h0.8
  text "C" at -66.473,-110.979 h0.8
  text "C" at 118.527,-110.979 h0.8
  text "D" at -66.473,-183.229 h0.8
  text "D" at 118.527,-183.229 h0.8
  text "ENGINEER:" at -24.096,-186.707 h0.8
  text "PROJECT NAME:" at 31.344,-186.707 h0.8
  text "'.ProjectName'" at 45.117,-189.854 h0.8
  text "'._HWEngineer'" at -21.684,-190.099 h0.8
  text "PCB DESIGNER:" at -24.096,-194.2 h0.8
  text "BOARD NAME:" at 31.344,-194.207 h0.8
  text "'._CompanyName'" at -58.473,-195.854 h0.8
  text "'._BoardName'" at 45.117,-197.604 h0.8
  text "'._HWEngineer'" at -21.811,-197.846 h0.8
  text "'._address1'" at -58.473,-200.854 h0.8
  text "DATE:" at -24.096,-201.947 h0.8
  text "PART NO.:" at 31.344,-201.947 h0.8
  text "Ver:" at 84.684,-201.947 h0.8
  text "'._address2'" at -58.473,-203.354 h0.8
  text "'._Revision'" at 93.772,-204.614 h0.8
  text "'._DocumentDate'" at -21.811,-204.704 h0.8
  text "'._PCBModel'" at 45.117,-205.354 h0.8
  text "'._address3'" at -58.473,-205.854 h0.8
  text "'._address4'" at -58.473,-208.354 h0.8
  text "FILE NAME:" at -24.096,-209.567 h0.8
  text "SCH. NO.:" at 31.344,-209.567 h0.8
  text "SCALE:" at 84.684,-209.567 h0.8
  text "A4 M1:1" at 94.407,-212.234 h0.8
  text "'.ProjectNumber'" at 45.117,-212.854 h0.8
  text "'.Pcb_File_Name_No_Path'" at -21.747,-212.993 h0.8
  text "1" at -33.473,-218.354 h0.8
  text "2" at 26.527,-218.354 h0.8
  text "3" at 86.527,-218.354 h0.8
Drill Drawing:
  circle w0.254: c-48.444,-167.01 r0.847
  lines w0.254: -49.291,-164.046 -47.597,-164.046 -47.597,-162.353 -49.291,-162.353 -49.291,-164.046 ; -49.291,-158.543 -47.597,-158.543 -48.444,-160.236 -49.291,-158.543 ; -49.291,-156.003 -48.867,-156.003 -48.444,-156.426 -48.021,-156.003 -47.597,-156.003 -48.021,-155.58 -47.597,-155.157 -48.021,-155.157 -48.444,-154.733 -48.867,-155.157 -49.291,-155.157 -48.867,-155.58 -49.291,-156.003
  lines w0.381: -50.809,-168.999 107.441,-168.999 ; -50.809,-153.759 107.441,-153.759 ; -36.817,-172.809 -36.817,-149.949 ; -20.312,-172.809 -20.312,-149.949 ; 7.366,-172.809 7.366,-149.949 ; 20.215,-172.809 20.215,-149.949 ; 38.854,-172.809 38.854,-149.949 ; 72.372,-172.809 72.372,-149.949 ; 87.354,-172.809 87.354,-149.949 ; -50.809,-172.809 107.441,-172.809 107.441,-149.949 -50.809,-149.949 -50.809,-172.809
  text "'.Layer_Name'" at 77.409,0.652 h1.5
  text "Symbol" at -48.523,-152.616 h1.83
  text "Count" at -35.674,-152.616 h1.83
  text "Hole Size" at -19.169,-152.616 h1.83
  text "Plated" at 8.509,-152.616 h1.83
  text "Hole Type" at 21.358,-152.616 h1.83
  text "Drill Layer Pair" at 39.997,-152.616 h1.83
  text "Via/Pad" at 73.515,-152.616 h1.83
  text "Pad Shape" at 88.497,-152.616 h1.83
  text "1017" at -35.674,-156.426 h1.52
  text "0.150mm (5.91mil)" at -19.169,-156.426 h1.52
  text "PTH" at 8.509,-156.426 h1.52
  text "Round" at 21.358,-156.426 h1.52
  text "1-SIG-TOP - 4-SIG-BOT" at 39.997,-156.426 h1.52
  text "Via" at 73.515,-156.426 h1.52
  text "Rounded" at 88.497,-156.426 h1.52
  text "32" at -35.674,-160.236 h1.52
  text "0.300mm (11.81mil)" at -19.169,-160.236 h1.52
  text "PTH" at 8.509,-160.236 h1.52
  text "Round" at 21.358,-160.236 h1.52
  text "1-SIG-TOP - 4-SIG-BOT" at 39.997,-160.236 h1.52
  text "Via" at 73.515,-160.236 h1.52
  text "Rounded" at 88.497,-160.236 h1.52
  text "3" at -35.674,-164.046 h1.52
  text "0.991mm (39.00mil)" at -19.169,-164.046 h1.52
  text "NPTH" at 8.509,-164.046 h1.52
  text "Round" at 21.358,-164.046 h1.52
  text "1-SIG-TOP - 4-SIG-BOT" at 39.997,-164.046 h1.52
  text "Pad" at 73.515,-164.046 h1.52
  text "Rounded" at 88.497,-164.046 h1.52
  text "4" at -35.674,-167.856 h1.52
  text "2.200mm (86.61mil)" at -19.169,-167.856 h1.52
  text "PTH" at 8.509,-167.856 h1.52
  text "Round" at 21.358,-167.856 h1.52
  text "1-SIG-TOP - 4-SIG-BOT" at 39.997,-167.856 h1.52
  text "Pad" at 73.515,-167.856 h1.52
  text "Rounded" at 88.497,-167.856 h1.52
  text "1056 Total" at -35.674,-171.666 h1.52
3D Body BOT:
  text "'.Layer_Name'" at 92.109,32.652 h1.5
Courtyard BOT:
  text "'.Layer_Name'" at 95.109,25.652 h1.5
BOT ASSY:
  text "'.Layer_Name'" at 91.109,29.152 h1.5
Layer Stack:
  drawing of 460 lines, arcs and shapes, not listed
  text "'.Layer_Name'" at 77.409,18.652 h1.5
  text "Layer" at -33.031,-24.058 h1.52
  text "Name" at -22.62,-24.058 h1.52
  text "Material" at 0.996,-24.058 h1.52
  text "Thickness" at 22.834,-24.058 h1.52
  text "Constant" at 39.34,-24.058 h1.52
  text "Board Layer Stack" at 53.814,-24.058 h1.52
  text "Top Overlay" at -22.62,-27.106 h1.52
  text "Top Solder" at -22.62,-30.154 h1.52
  text "Solder Resist" at 0.996,-30.154 h1.52
  text "0.39mil" at 22.834,-30.154 h1.52
  text "3.5" at 39.34,-30.154 h1.52
  text "1" at -33.031,-33.202 h1.52
  text "1-SIG-TOP" at -22.62,-33.202 h1.52
  text "1.38mil" at 22.834,-33.202 h1.52
  text "Dielectric 1" at -22.62,-36.25 h1.52
  text "FR-4" at 0.996,-36.25 h1.52
  text "4.33mil" at 22.834,-36.25 h1.52
  text "4.29" at 39.34,-36.25 h1.52
  text "2" at -33.031,-39.298 h1.52
  text "2-SIG-GND" at -22.62,-39.298 h1.52
  text "CF-004" at 0.996,-39.298 h1.52
  text "1.38mil" at 22.834,-39.298 h1.52
  text "Dielectric 3" at -22.62,-42.346 h1.52
  text "23.62mil" at 22.834,-42.346 h1.52
  text "4.2" at 39.34,-42.346 h1.52
  text "3" at -33.031,-45.394 h1.52
  text "3-SIG-PWR" at -22.62,-45.394 h1.52
  text "CF-004" at 0.996,-45.394 h1.52
  text "1.38mil" at 22.834,-45.394 h1.52
  text "Dielectric 2" at -22.62,-48.442 h1.52
  text "4.33mil" at 22.834,-48.442 h1.52
  text "4.29" at 39.34,-48.442 h1.52
  text "4" at -33.031,-51.49 h1.52
  text "4-SIG-BOT" at -22.62,-51.49 h1.52
  text "1.38mil" at 22.834,-51.49 h1.52
  text "Bottom Solder" at -22.62,-54.538 h1.52
  text "Solder Resist" at 0.996,-54.538 h1.52
  text "0.39mil" at 22.834,-54.538 h1.52
  text "3.5" at 39.34,-54.538 h1.52
  text "Bottom Overlay" at -22.62,-57.586 h1.52

## Dimensions
0,0 to 43.5,31.865 on Fiducials
0,0 to 2.5,5.865 on Fiducials
0,0 to 1.511,6.5 on Fiducials
1.865,6.5 to 1.5,28.5 on Fiducials
2.5,26.8 to 43.5,33.7 on Fiducials
0,2 to 50,2 on Dimensions
2,0 to 2,35 on Dimensions

## Text inside footprints (layer, text, board x,y; h text height)
C11: TOP ASSY "+" at 11.157,10.549 h0.8 r270; Top Overlay "+" at 12.657,9.393 h0.8 r270
C21: TOP ASSY "+" at 19.13,3.414 h0.8 r270; Top Overlay "+" at 20.957,1.743 h0.8 r270
C22: TOP ASSY "+" at 28.03,3.414 h0.8 r270; Top Overlay "+" at 29.857,1.743 h0.8 r270
Logo1: Top Overlay "CPU" at 33.101,31 h1.2; Top Overlay "Acme" at 29.451,32.85 h1.5
P1: TOP ASSY "1" at 45.88,14.978 h1 r90; TOP ASSY "2" at 45.88,16.501 h1 r90; TOP ASSY "3" at 45.869,18.026 h1 r90; TOP ASSY "4" at 45.88,19.423 h1 r90; TOP ASSY "5" at 45.869,20.947 h1 r90
P2: TOP ASSY "4" at 11.905,4.119 h1; TOP ASSY "3" at 10.508,4.13 h1; TOP ASSY "2" at 8.983,4.119 h1; TOP ASSY "1" at 7.46,4.119 h1
P3: TOP ASSY "1" at 4.02,24.222 h1 r270; TOP ASSY "2" at 4.02,22.699 h1 r270; TOP ASSY "3" at 4.031,21.174 h1 r270; TOP ASSY "4" at 4.02,19.777 h1 r270; TOP ASSY "5" at 4.031,18.253 h1 r270
P4: TOP ASSY "5" at 8.053,30.869 h1 r180; TOP ASSY "4" at 9.577,30.88 h1 r180; TOP ASSY "3" at 10.974,30.869 h1 r180; TOP ASSY "2" at 12.499,30.88 h1 r180; TOP ASSY "1" at 14.022,30.88 h1 r180
U1: TOP ASSY "*" at 15.809,24.265 h0.8; Top Overlay "*" at 14.583,24.2 h0.8; 3D Body TOP "*" at 15.758,24.294 h0.8
X1: TOP ASSY "1" at 22.119,33.008 h0.5; TOP ASSY "2" at 22.059,31.75 h0.5; TOP ASSY "3" at 20.743,32.973 h0.5; TOP ASSY "4" at 20.731,31.692 h0.5; TOP ASSY "5" at 19.439,33.019 h0.5; TOP ASSY "6" at 19.485,31.75 h0.5